# EAGLE board Swarm Board (EAGLE 6.2)
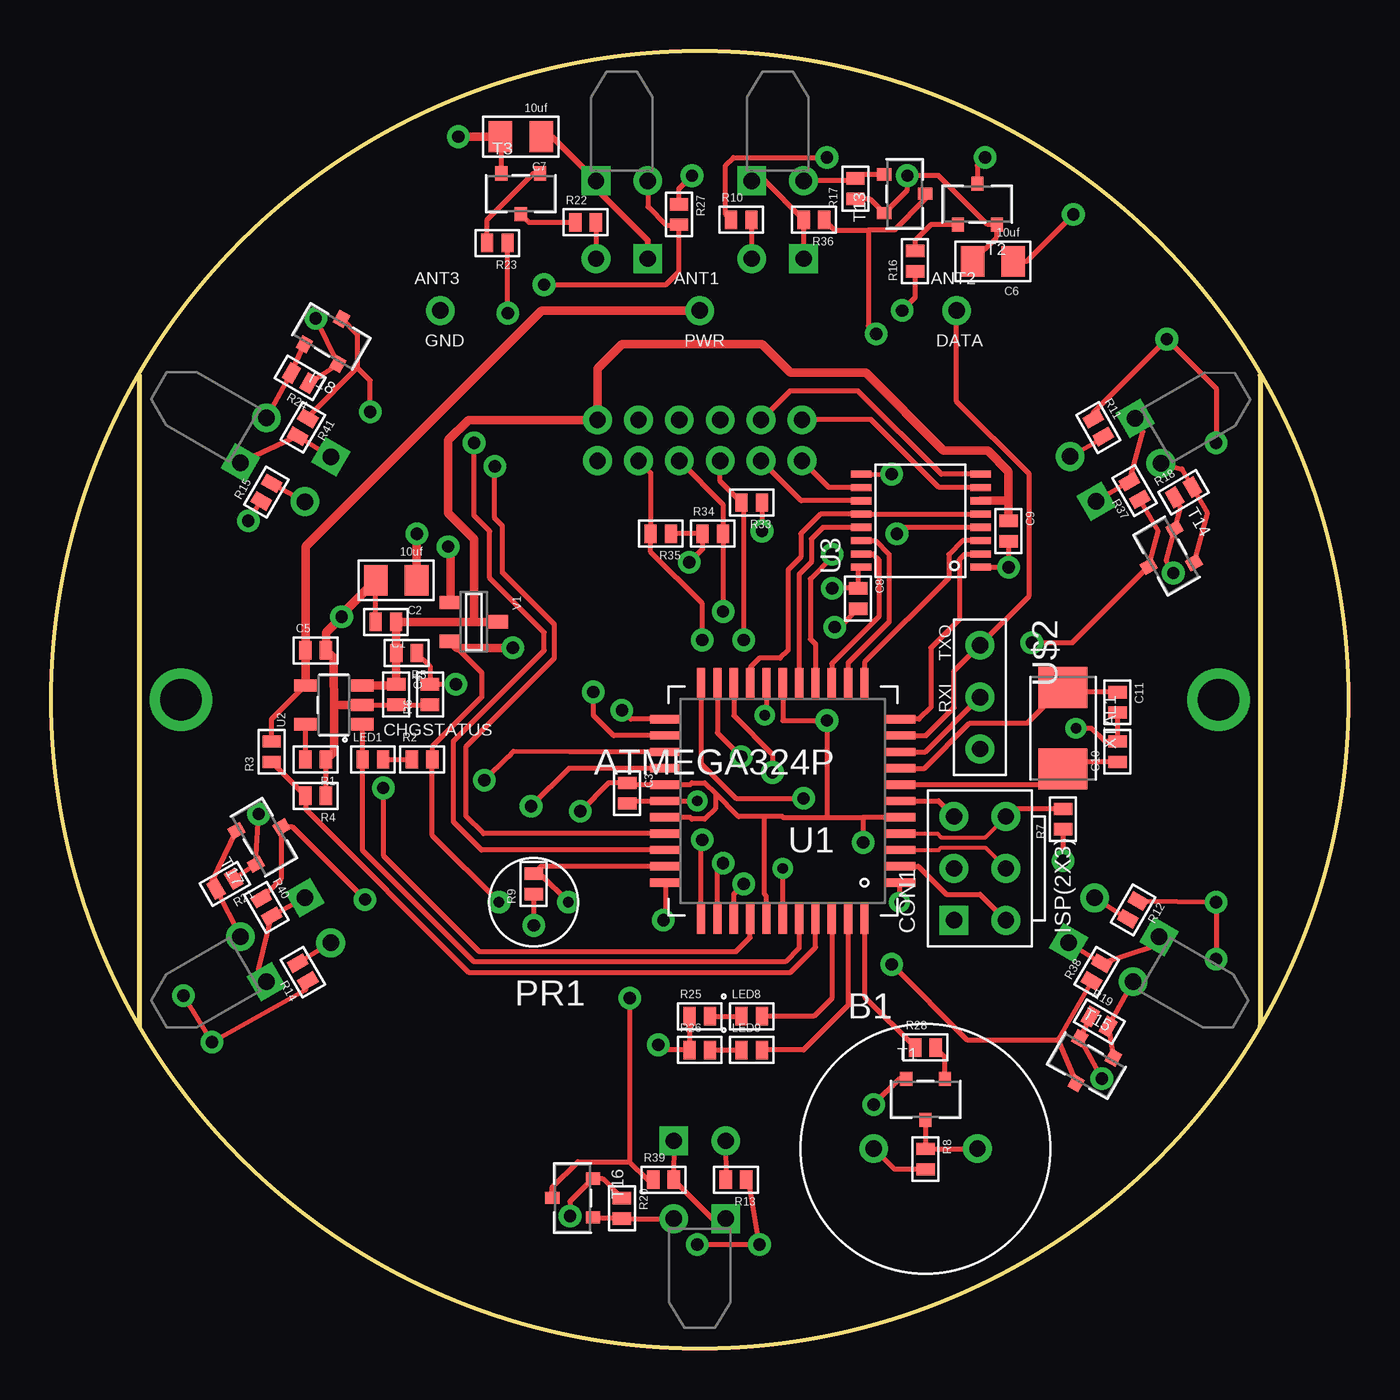
[diagram p0: board, top side]
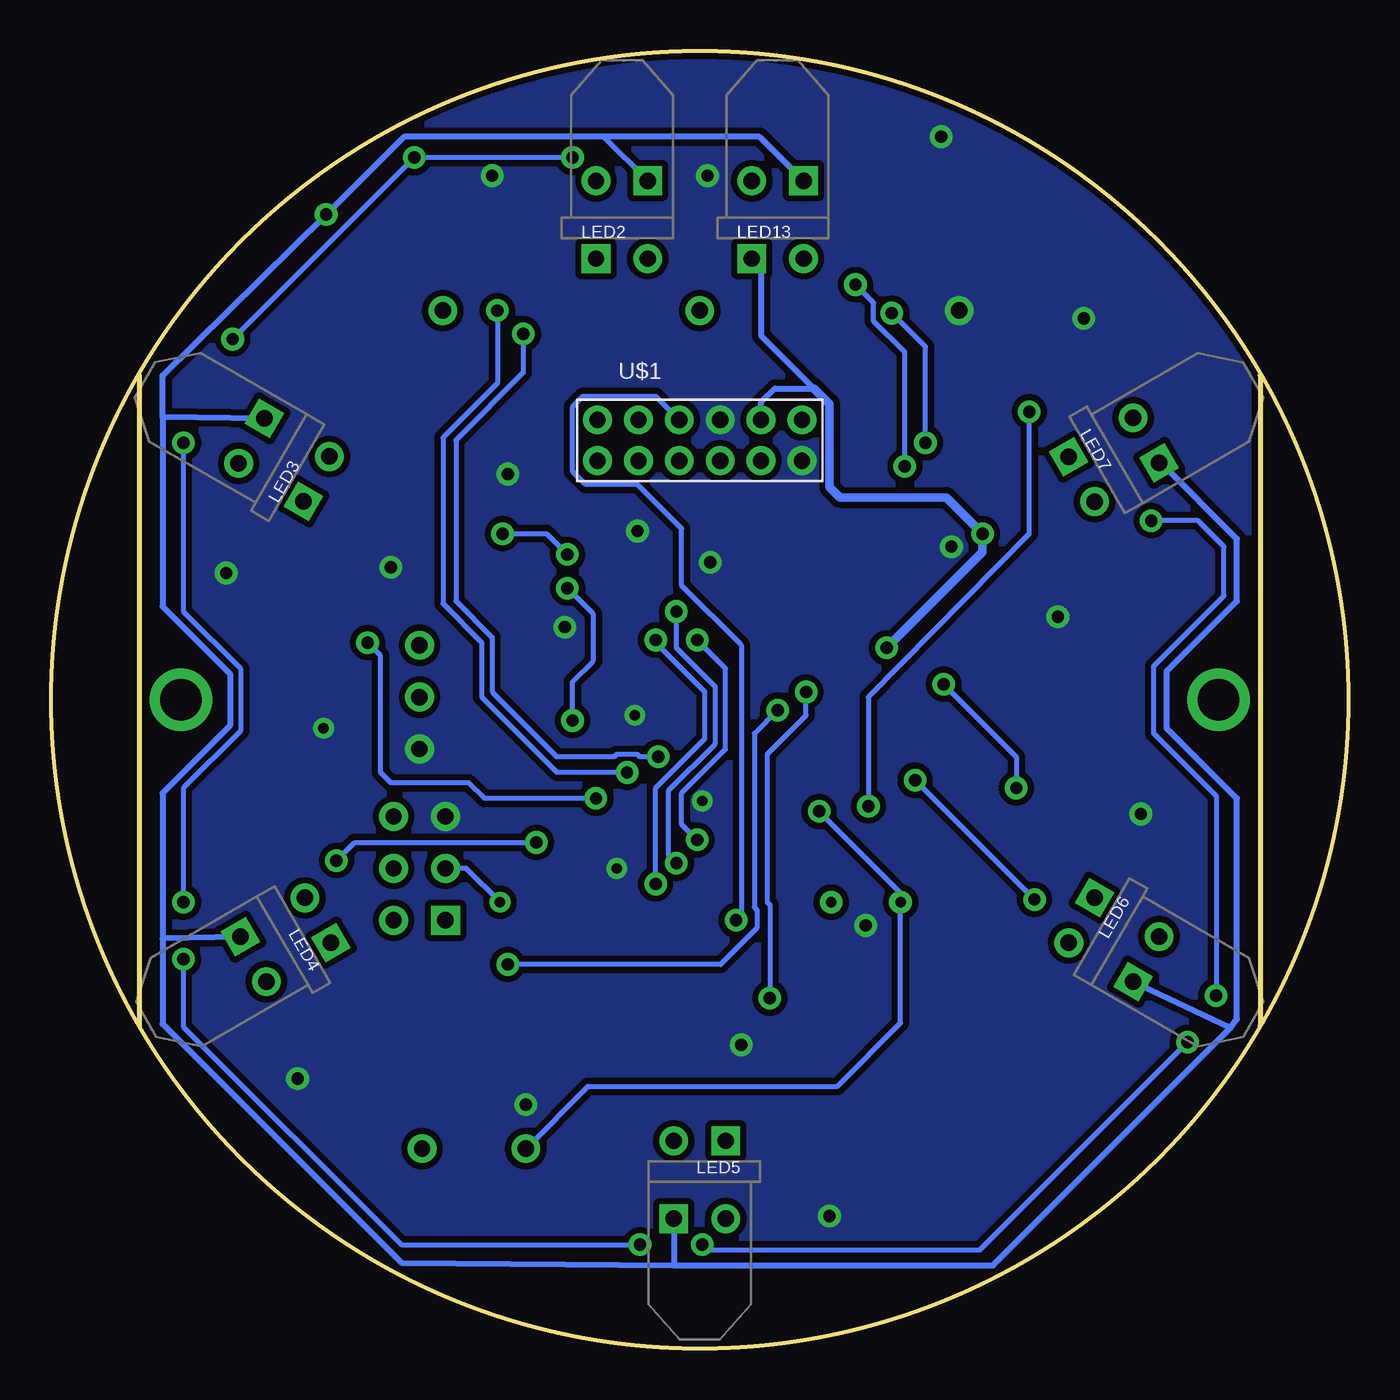
[diagram p1: board, bottom side, seen from below]

Size 63.5 x 63.5 mm. Coordinates in mm from the lower left corner, seen from the top.
Outline: 4.32,47.62 4.32,15.8
Outline: 59.18,47.62 59.18,15.8
Outline: circle at 31.75,31.75 radius 31.75
Copper layers (1*16): Top 0.035mm / dielectric 1.5mm / Bottom 0.035mm
Design rules: minimum track width 8mil, minimum drill 20mil, track to track 8mil, track to pad 8mil, pad to pad 8mil, via to via 8mil, smd to smd 8mil, copper to edge 10mil, drill to drill 8mil, minimum pad ring 12mil, minimum via ring 10mil, stop-mask expansion 4mil, vias tented up to drill 25mil, thermal gap 10mil

## Footprints (pad centres in the part's own frame; a part is rotated, then mirrored left to right if it is on the bottom)
ANTENNA = drill 0.8: P$1 0,0
PIEZOBUZZER = drill 0.8: 1 -2.54,0; 2 2.54,0
0603 = smd 0.6 x 0.9: 1 -0.5,0; 2 0.5,0
0805 = smd 1.15 x 1.5: 1 -1,0; 2 1,0
PINHEADER(2X3) = drill 0.8 square: 1 -2.54,1.27 | drill 0.8: 2 0,1.27; 3 2.54,1.27; 4 2.54,-1.27; 5 0,-1.27; 6 -2.54,-1.27
MOUNTINGHOLE = drill 2.032 pad 2.286: P$2 0,0
LED0603 = smd 0.6 x 0.9: 1 -0.5,0; 2 0.5,0
5MM_LED_RA = drill 0.8 square: 1 -1.27,0 | drill 0.8: 2 1.27,0
CDSPHOTOCELL = drill 0.508: 1 -1.694,0; 2 1.702,0
SOT23 = smd 0.6 x 0.7: 1 0.95,1; 2 -0.95,1; 3 0,-1
3MM_LED_RA = drill 0.8 square: 1 -1.27,0 | drill 0.8: 2 1.27,0
TQFP44 = smd 1.5 x 0.406: 1 -5.75,4; 2 -5.75,3.2; 3 -5.75,2.4; 4 -5.75,1.6; 5 -5.75,0.8; 6 -5.75,0; 7 -5.75,-0.8; 8 -5.75,-1.6; 9 -5.75,-2.4; 10 -5.75,-3.2; 11 -5.75,-4; 23 5.75,-4; 24 5.75,-3.2; 25 5.75,-2.4; 26 5.75,-1.6; 27 5.75,-0.8; 28 5.75,0; 29 5.75,0.8; 30 5.75,1.6; 31 5.75,2.4; 32 5.75,3.2; 33 5.75,4 | smd 0.406 x 1.5: 12 -4,-5.75; 13 -3.2,-5.75; 14 -2.4,-5.75; 15 -1.6,-5.75; 16 -0.8,-5.75; 17 0,-5.75; 18 0.8,-5.75; 19 1.6,-5.75; 20 2.4,-5.75; 21 3.2,-5.75; 22 4,-5.75; 34 4,5.75; 35 3.2,5.75; 36 2.4,5.75; 37 1.6,5.75; 38 0.8,5.75; 39 0,5.75; 40 -0.8,5.75; 41 -1.6,5.75; 42 -2.4,5.75; 43 -3.2,5.75; 44 -4,5.75
(OT)SOT-23(5PAD) = smd 0.6 x 1.1: 1 -0.95,-1.4; 2 0,-1.4; 3 0.95,-1.4; 4 0.95,1.4; 5 -0.95,1.4
16SSOP = smd 0.35 x 1: 1 -2.275,-2.95; 2 -1.625,-2.95; 3 -0.975,-2.95; 4 -0.325,-2.95; 5 0.325,-2.95; 6 0.975,-2.95; 7 1.625,-2.95; 8 2.275,-2.95; 9 2.275,2.9; 10 1.625,2.9; 11 0.975,2.9; 12 0.325,2.9; 13 -0.325,2.9; 14 -0.975,2.9; 15 -1.625,2.9; 16 -2.275,2.9
FEMALE_HEADER_2MM_2X6 = drill 0.8: 1 -5,-1; 2 -3,-1; 3 -1,-1; 4 1,-1; 5 3,-1; 6 5,-1; 7 5,1; 8 3,1; 9 1,1; 10 -1,1; 11 -3,1; 12 -5,1
3PINHEADER_.100" = drill 0.8: 1 -2.54,0; 2 0,0; 3 2.54,0
(TT/NB)SOT-23(3PAD) = smd 0.65 x 1.05: 1 -0.95,-1.15; 2 0.95,-1.15; 3 0,1.15
SMDXTAL = smd 2 x 2.4: 1 -2,0; 2 2,0

## Placement (x,y rotation side)
ANT1  ANTENNA  [ANTENNA]  31.75,50.8 0 top
ANT2  ANTENNA  [ANTENNA]  44.32,50.8 0 top
ANT3  ANTENNA  [ANTENNA]  19.05,50.8 0 top
B1  PIEZOBUZZER  [PIEZOBUZZER]  42.8,9.78 0 top
C1  1uf  [0603]  16.38,35.56 180 top
C2  10uf  [0805]  16.89,37.59 180 top
C3  1uf  [0603]  28.19,27.18 270 top
C4  4.7uf  [0603]  16.89,32 270 top
C5  4.7uf  [0603]  12.95,34.16 0 top
C6  10uf  [0805]  46.1,53.21 180 top
C7  10uf  [0805]  22.99,59.31 180 top
C8  1uf  [0603]  39.5,36.7 270 top
C9  1uf  [0603]  46.86,40.01 270 top
C10  12pf  [0603]  52.2,29.21 90 top
C11  12pf  [0603]  52.2,31.62 270 top
CON1  ISP(2X3)  [PINHEADER(2X3)]  45.47,23.5 90 top
H1  MOUNTINGHOLE  [MOUNTINGHOLE]  6.35,31.75 0 top
H2  MOUNTINGHOLE  [MOUNTINGHOLE]  57.15,31.75 0 top
LED1  red  [LED0603]  15.75,28.83 0 top
LED2  IR  [5MM_LED_RA]  35.56,53.34 0 bottom
LED3  IR  [5MM_LED_RA]  50.51,42.56 60 bottom
LED4  IR  [5MM_LED_RA]  50.44,20.95 120 bottom
LED5  IR  [5MM_LED_RA]  31.75,10.16 180 bottom
LED6  IR  [5MM_LED_RA]  13.06,20.95 240 bottom
LED7  IR  [5MM_LED_RA]  13.06,42.55 300 bottom
LED8  red  [LED0603]  34.29,16.26 0 top
LED9  green  [LED0603]  34.29,14.61 0 top
LED13  IR  [5MM_LED_RA]  27.94,53.34 0 bottom
PR1  500k-20k  [CDSPHOTOCELL]  23.62,21.84 180 top
R1  2k  [0603]  12.95,28.83 180 top
R2  750  [0603]  18.16,28.83 0 top
R3  2k  [0603]  10.79,29.21 90 top
R4  3k  [0603]  12.95,27.05 180 top
R5  7k  [0603]  17.4,34.04 180 top
R6  18k  [0603]  18.54,32 90 top
R7  10k  [0603]  49.53,25.91 90 top
R8  1k  [0603]  42.8,9.27 270 top
R9  20k  [0603]  23.62,22.73 90 top
R10  [0603]  33.78,55.24 0 top
R11  [0603]  51.26,45.07 300 top
R12  [0603]  52.96,21.46 240 top
R13  [0603]  33.53,8.26 180 top
R14  [0603]  12.32,18.41 120 top
R15  [0603]  10.54,41.91 60 top
R16  1k  [0603]  42.29,53.21 90 top
R17  [0603]  39.37,56.77 90 top
R18  [0603]  55.43,41.91 30 top
R19  [0603]  51.31,16 330 top
R20  [0603]  27.94,6.86 270 top
R21  [0603]  8.51,22.73 210 top
R22  [0603]  26.16,55.12 0 top
R23  1k  [0603]  21.84,54.1 180 top
R24  [0603]  12.19,47.5 150 top
R25  750  [0603]  31.75,16.26 0 top
R26  750  [0603]  31.75,14.61 0 top
R27  [0603]  30.73,55.5 270 top
R28  1k  [0603]  42.8,14.73 0 top
R33  [0603]  34.29,41.4 180 top
R34  [0603]  32.38,39.88 0 top
R35  [0603]  29.84,39.88 180 top
R36  [0603]  37.34,55.24 180 top
R37  [0603]  53.04,41.99 120 top
R38  [0603]  51.18,18.41 60 top
R39  [0603]  29.97,8.26 0 top
R40  [0603]  10.54,21.59 300 top
R41  [0603]  12.32,45.09 240 top
T1  NPN2N2222  [SOT23]  42.8,12.19 0 top
T2  NPN2N2222  [SOT23]  45.34,56.01 180 top
T3  NPN2N2222  [SOT23]  22.99,56.52 0 top
T4  TEFT4300  [3MM_LED_RA]  35.56,57.15 0 top
T5  TEFT4300  [3MM_LED_RA]  53.69,44.42 300 top
T6  TEFT4300  [3MM_LED_RA]  53.59,19.05 240 top
T7  TEFT4300  [3MM_LED_RA]  31.75,6.35 180 top
T8  TEFT4300  [3MM_LED_RA]  9.91,19.05 120 top
T9  TEFT4300  [3MM_LED_RA]  9.91,44.45 60 top
T10  TEFT4300  [3MM_LED_RA]  27.94,57.15 0 top
T13  NPN2N2222  [SOT23]  41.78,56.52 90 top
T14  NPN2N2222  [SOT23]  54.6,38.78 300 top
T15  NPN2N2222  [SOT23]  50.67,13.84 330 top
T16  NPN2N2222  [SOT23]  25.53,7.37 270 top
T17  NPN2N2222  [SOT23]  10.41,25.02 120 top
T18  NPN2N2222  [SOT23]  13.72,49.53 150 top
U1  ATMEGA324P  [TQFP44]  35.81,26.8 180 top
U2  MCP73832SOT-23  [(OT)SOT-23(5PAD)]  13.84,31.5 90 top
U3  TB6552FN/FNG  [16SSOP]  42.55,40.51 90 top
U$1  MAIN_CONNECTOR  [FEMALE_HEADER_2MM_2X6]  31.75,44.45 0 bottom
U$2  FTDI_3PIN  [3PINHEADER_.100"]  45.47,31.88 270 top
V1  MCP1700-3002E  [(TT/NB)SOT-23(3PAD)]  20.7,35.56 270 top
XTAL1  10Mhz  [SMDXTAL]  49.53,30.35 270 top

## Library data of the parts
ANT1-ANT3 CON1 H1 H2 U$1 U$2 = Mechanical
B1 C1-C11 LED1-LED9 LED13 PR1 R1-R28 R33-R41 T1-T10 T13-T18 XTAL1 = Passive
U1 U3 = DigitalIC
U2 V1 = PowerIC

## Nets
+3V: B1.1 C2.1 C3.1 C6.1 C7.1 C8.1 LED2.1 LED3.1 LED4.1 LED5.1 LED6.1 LED7.1 LED13.1 PR1.2 R2.2 R7.1 R8.2 R36.2 R37.2 R38.2 R39.2 R40.2 R41.2 T4.1 T5.1 T6.1 T7.1 T8.1 T9.1 T10.1 U1.5 U1.17 U1.27 U1.29 U1.38 U3.16 U$1.8 V1.2
+VBAT: C1.1 C4.1 C9.1 R5.2 U2.3 U3.6 U$1.7 V1.3
+VCHG: ANT1.P$1 C5.1 R3.2 U2.4
AIN1: U1.11 U3.2
AIN2: U1.12 U3.3
APWM: U1.15 U3.4
BIN1: U1.14 U3.15
BIN2: U1.13 U3.14
BPWM: U1.16 U3.13
BUMPER: R35.2 U1.34 U$1.5
BUZZER: R28.1 U1.44
CHGDETECT: R3.1 R4.2 U1.41
CHGSTATUS: LED1.1 U1.40 U2.1
DATAANTENNA: ANT2.P$1 U1.10 U$2.1
DISTANCELED: R23.1 U1.31
DISTANCERECEIVE: R27.2 T10.2 U1.30
GND: ANT3.P$1 C1.2 C2.2 C3.2 C4.2 C5.2 C6.2 C7.2 C8.2 C9.2 C10.2 C11.2 CON1.3 R1.1 R4.1 R6.1 R9.1 R17.1 R18.1 R19.1 R20.1 R21.1 R24.1 R25.1 R26.1 R27.1 R33.1 R34.1 R35.1 T1.2 T2.2 T3.2 T13.2 T14.2 T15.2 T16.2 T17.2 T18.2 U1.6 U1.18 U1.28 U1.39 U2.2 U3.1 U3.9 U$1.6 U$1.9 U$2.3 V1.1
IRENABLE: U1.33 U$1.10
LED1: LED8.2 U1.42
LED2: LED9.2 U1.43
LIGHTSENSE: PR1.1 R9.2 U1.32
LINESENSE1: R33.2 U1.36 U$1.3
LINESENSE2: R34.2 U1.35 U$1.4
MA+: U3.7 U$1.12
MA-: U3.8 U$1.11
MB+: U3.11 U$1.2
MB-: U3.10 U$1.1
N$1: R1.2 U2.5
N$2: CON1.2 U1.1
N$3: CON1.6 U1.2
N$4: LED1.2 R2.1
N$5: CON1.5 U1.3
N$6: CON1.4 R7.2 U1.4
N$8: U1.9 U$2.2
N$9: B1.2 R8.1 T1.3
N$10: R10.1 R11.1 R12.1 R13.1 R14.1 R15.1 T2.3
N$11: R16.2 T2.1
N$12: R22.1 T3.3
N$13: LED2.2 R10.2
N$14: LED3.2 R11.2
N$15: LED4.2 R12.2
N$16: LED5.2 R13.2
N$17: LED6.2 R14.2
N$18: LED7.2 R15.2
N$19: R23.2 T3.1
N$20: LED8.1 R25.2
N$21: LED9.1 R26.2
N$23: C10.1 U1.7 XTAL1.2
N$24: C11.1 U1.8 XTAL1.1
N$25: LED13.2 R22.2
N$26: R28.2 T1.1
N$27: R17.2 T4.2 T13.1
N$34: R24.2 T9.2 T18.1
N$35: R21.2 T8.2 T17.1
N$36: R20.2 T7.2 T16.1
N$37: R19.2 T6.2 T15.1
N$38: R18.2 T5.2 T14.1
RX1: R36.1 T13.3 U1.21
RX2: R37.1 T14.3 U1.22
RX3: R38.1 T15.3 U1.23
RX4: R39.1 T16.3 U1.24
RX5: R40.1 T17.3 U1.25
RX6: R41.1 T18.3 U1.26
STBY: U1.19 U3.5 U3.12
TRANSMITLEDS: R16.1 U1.20
VSENSE: R5.1 R6.2 U1.37

## Tracks (layer width: path | path; a pad name or v marks a point on that pad's centre or on a via)
+3V  (via drill 0.6 pad 0.41, 0.6 pad 0.61)
  Top 0.254: 32.51,27.18 32,27.69 31.37,27.69 31.28,27.6 U1.27 28.27,27.6 C3.1 27.3,27.68 v25.91,26.29 | 32.51,27.18 32.51,26.42 32,25.91 31.37,25.91 31.28,26 U1.29 | 32.51,27.18 33.66,26.04 34.92,26.04 | 37.97,26 35.81,26 35.81,26.04 34.92,26.04 | 37.97,26 39.75,26 | U1.38 35.01,22.14 34.92,22.23 34.92,26.04 | LED2.1 R36.2 34.93,57.15 T4.1 | LED3.1 51.15,41.48 R37.2 53.44,44.85 T5.1 | LED4.1 R38.2 53.98,19.68 T6.1 | LED5.1 R39.2 32.38,6.35 T7.1 | LED6.1 R40.2 10.16,18.54 T8.1 | LED7.1 R41.2 T9.1 | U3.16 39.53,38.23 39.5,38.2 C8.1 39.49,37.21 v38.23,37.21 | R8.2 41.27,8.77 B1.1 | V1.2 21.08,33.08 21.08,31.88 18.66,29.46 R2.2 18.66,25.1 PR1.2 | U1.5 39.75,26 | R7.1 v49.53,23.88 | v39.75,24.77 39.75,26 | 37.97,26 v37.97,30.73 35.81,30.73 U1.17 | C6.1 47.75,53.21 v50.04,55.5
  Top 0.305: LED13.1 29.21,54.23 26.67,56.77 T10.1 24.51,59.31 C7.1
  Top 0.406: C2.1 17.89,39.86 v17.91,39.88 | v22.61,34.29 19.87,34.29 V1.2
  Bottom 0.254: 36.45,59.31 T4.1 | 9.19,43.35 T9.1 | v49.53,23.88 48.64,24.77 v39.75,24.77 | v37.97,30.73 37.97,32.64 36.96,33.66 36.96,35.94 v38.23,37.21 | v25.91,26.29 21.92,22.3 PR1.2 21.92,15.93 25.02,12.83 37.21,12.83 B1.1
  Bottom 0.305: T10.1 28.83,59.31 36.45,59.31 46.23,59.31 v50.04,55.5 58.04,47.62 58.04,45.59 | 58.04,45.59 58.04,36.32 54.74,33.02 54.74,30.48 58.04,27.18 58.04,20.07 | 58.04,20.07 58.04,15.88 46.35,4.19 33.02,4.06 | 33.02,4.06 17.4,4.06 5.78,15.68 | 5.78,15.68 5.46,16.13 5.46,26.92 8.89,30.35 8.89,33.15 5.46,36.58 5.46,39.62 9.19,43.35 | T5.1 58.04,45.59 | T6.1 58.04,20.07 | T7.1 33.02,4.06 | T8.1 5.78,15.68 | U$1.8 28.75,46.31 28.07,46.99 26.16,46.99 28.75,49.58 28.75,52.88 LED13.1
  Bottom 0.406: v22.61,34.29 17.91,38.99 v17.91,39.88 19.68,41.66 24.89,41.66 25.4,42.16 25.4,46.23 26.16,46.99
+VBAT
  Top 0.254: 16.83,32.45 C4.1 | 16.89,34.03 R5.2 | 16.9,35.54 C1.1
  Top 0.406: U2.3 16.83,32.45 | C4.1 16.89,34.03 | R5.2 16.9,35.54 | V1.3 20.7,35.56 | 20.7,35.56 C1.1 | 46.86,41.53 46.86,42.93 45.85,43.94 43.69,43.94 39.88,47.75 36.2,47.75 34.8,49.15 27.94,49.15 26.75,47.96 U$1.7 20.43,45.45 19.43,44.45 19.43,40.89 20.7,39.62 20.7,35.56 | 46.86,41.53 C9.1 | U3.6 46.82,41.49 46.86,41.53
+VCHG
  Top 0.254: 12.45,32.46 U2.4 10.79,30.8 R3.2
  Top 0.406: 12.45,32.46 C5.1 12.45,39.25 24,50.8 ANT1.P$1
AIN1
  Top 0.254: U3.2 45.47,38.86 44.7,38.86 44.45,38.61 44.45,35.69 43.05,34.29 43.05,31.37 42.48,30.8 U1.11
AIN2
  Top 0.254: U3.3 44.62,39.54 43.94,38.86 43.94,37.72 39.81,33.59 U1.12
APWM  (via drill 0.6 pad 0.41)
  Top 0.254: U3.4 41.71,40.19 v41.4,39.88 | v38.23,38.86 38.23,38.73 37.16,37.67 37.16,34.72 37.41,34.47 U1.15
  Bottom 0.254: v41.4,39.88 39.24,39.88 v38.23,38.86
BIN1
  Top 0.254: U3.15 40.23,38.89 40.51,38.61 40.51,35.81 38.21,33.52 U1.14
BIN2
  Top 0.254: U3.14 40.34,39.54 41.02,38.86 41.02,35.56 39.01,33.55 U1.13
BPWM
  Top 0.254: U3.13 37.77,40.19 37.21,39.62 37.21,38.48 36.61,37.88 U1.16
BUMPER  (via drill 0.6 pad 0.41)
  Top 0.254: U1.34 31.81,24.83 v31.88,24.89 | v31.88,34.67 31.88,36.45 29.34,38.98 R35.2 29.34,42.85 U$1.5
  Bottom 0.254: v31.88,24.89 32.64,25.65 32.64,27.18 30.48,29.34 30.48,33.27 v31.88,34.67
BUZZER
  Top 0.254: U1.44 39.81,17.22 R28.1
CHGDETECT
  Top 0.254: R3.1 R4.2 12.45,26.41 20.45,18.41 36.2,18.41 37.41,19.63 U1.41
CHGSTATUS
  Top 0.254: U2.1 LED1.1 15.25,24.38 20.7,18.92 35.94,18.92 36.61,19.6 U1.40
DATAANTENNA
  Top 0.254: U1.10 42.82,30 44.2,31.37 44.2,33.15 U$2.1 47.88,36.83 47.88,42.8 44.32,46.35 ANT2.P$1
DISTANCELED  (via drill 0.6 pad 0.41)
  Top 0.254: U1.31 21.07,24.4 19.68,25.78 19.68,29.72 24.13,34.16 24.13,35.05 21.46,37.72 21.46,40.01 20.7,40.77 v20.7,44.32 | v22.35,50.67 22.35,54.09 R23.1
  Bottom 0.254: v20.7,44.32 20.7,49.02 v22.35,50.67
DISTANCERECEIVE  (via drill 0.6 pad 0.41)
  Top 0.254: T10.2 29.21,55.88 30.1,54.99 R27.2 30.73,52.7 30.1,52.07 v24.13,52.07 | U1.30 21.16,25.2 20.32,26.04 20.32,29.46 24.64,33.78 24.64,35.43 22.1,37.97 22.1,40.26 21.72,40.64 v21.72,43.18
  Bottom 0.254: v21.72,43.18 21.72,48.77 23.24,50.29 23.24,51.18 v24.13,52.07
GND  (via drill 0.51, 0.6 pad 0.41, 0.6 pad 0.51)
  Top 0.254: U1.6 43.43,26.8 CON1.3 | C11.2 C10.2 51.57,29.71 50.93,30.35 v50.16,30.35 | U1.18 35.01,31.08 v34.92,30.99 | v31.62,26.8 U1.28 28.31,26.8 C3.2 | U1.39 v35.81,23.5 | R18.1 55.27,41.18 T14.2 54.57,38.57 v54.93,37.95 | R27.1 30.73,56.77 v31.37,57.4 | R17.1 40.08,56.27 T13.2 41.91,56.69 v41.91,57.4 43.43,57.4 45.83,55.01 T2.2 46.29,54.4 C6.2 | R19.1 T15.2 v51.44,13.21 | 27.87,7.43 R20.1 26.98,8.32 T16.2 25.4,7.19 v25.4,6.48 | R21.1 T17.2 v10.16,26.16 | R24.1 T18.2 v12.95,50.42 | T1.2 41.51,13.19 v40.26,11.94 | R25.1 R26.1 29.97,14.61 v29.72,14.86 | U3.9 39.9,42.78 v41.15,42.8 | U3.1 v46.85,38.24 v46.86,38.23 C9.2 | C8.2 38.6,35.31 v38.35,35.31 | R9.1 v23.62,20.7 | R4.1 R1.1 | U2.2 C4.2 | C4.2 | C1.2 C2.2 | C4.2 R6.1 | C7.2 22.04,59.26 T3.2 | R35.1 R34.1 31.89,39.12 v31.24,38.48 | R33.1 v34.8,40.01
  Top 0.406: C2.2 14.22,35.92 v14.22,35.81 13.45,35.04 C5.2 13.84,33.78 13.84,33.15 13.84,31.5 | C7.2 v19.94,59.31 | V1.1 19.55,39.12 v19.43,39.24 | U2.2 13.84,31.5 | R1.1 13.84,29.22 13.84,31.5
  Bottom 0.254: v10.16,26.16 10.16,26.29 | v31.24,38.48 31.24,38.61
  pour Bottom (isolate 0.305, no thermals): 16,61.21 27.43,66.29 46.99,63.25 62.74,47.24 66.8,26.42 55.12,4.06 27.69,-4.06 4.06,8.64 -1.91,28.07 -0.38,47.62 13.46,60.2
IRENABLE  (via drill 0.6 pad 0.41)
  Top 0.254: U1.33 30.06,21.05 v29.97,20.95
  Bottom 0.254: U$1.10 33.91,46.61 37.47,46.61 37.97,46.1 37.97,42.93 37.34,42.29 34.8,42.29 32.64,40.13 32.64,37.34 29.72,34.42 29.72,21.21 v29.97,20.95
LED1
  Top 0.254: U1.42 38.21,17.13 37.34,16.26 LED8.2
LED2
  Top 0.254: U1.43 39.01,16.79 36.83,14.61 LED9.2
LIGHTSENSE
  Top 0.254: PR1.1 23.93,23.23 R9.2 23.99,23.6 U1.32
LINESENSE1  (via drill 0.6 pad 0.41)
  Top 0.254: U1.36 33.41,22.24 v33.91,22.73 | v33.91,34.67 33.91,41.28 R33.2 32.75,42.44 U$1.3
  Bottom 0.254: v33.91,22.73 33.91,27.43 31.5,29.84 31.5,32.13 33.91,34.54 v33.91,34.67
LINESENSE2  (via drill 0.6 pad 0.41)
  Top 0.254: U1.35 32.61,23.47 v32.89,23.75 | U$1.4 32.88,41.31 R34.2 32.89,39.87 v32.89,36.07
  Bottom 0.254: v32.89,23.75 33.27,24.13 33.27,27.3 30.99,29.59 30.99,32.38 32.89,34.29 v32.89,36.07
MA+
  Top 0.254: U3.7 43.46,42.14 40.13,45.47 36.77,45.47 U$1.12
MA-
  Top 0.254: U3.8 43.57,42.79 39.5,46.86 36.16,46.86 U$1.11
MB+
  Top 0.254: U3.11 36.71,41.49 U$1.2
MB-
  Top 0.254: U3.10 38.06,42.14 U$1.1
N$1
  Top 0.254: U2.5 R1.2
N$2  (via drill 0.51)
  Top 0.203: U1.1 41.53,22.76
  Top 0.254: 41.53,22.76 v41.53,21.84
  Bottom 0.254: v41.53,21.84 43.18,23.5 CON1.2
N$3
  Top 0.254: U1.2 42.44,23.6 43.81,22.23 45.47,22.23 CON1.6
N$4
  Top 0.254: LED1.2 R2.1
N$5
  Top 0.203: U1.3 43.45,24.4 43.56,24.51 45.72,24.51 CON1.5
N$6
  Top 0.203: U1.4 43.38,25.2 43.56,25.02 45.72,25.02 CON1.4
  Top 0.254: R7.2 47.11,26.41 CON1.4
N$8
  Top 0.254: U1.9 42.79,29.2 U$2.2
N$9
  Top 0.254: T1.3 R8.1 B1.2
N$10  (via drill 0.6 pad 0.41)
  Top 0.254: R10.1 33.02,55.5 33.02,57.91 33.4,58.29 v37.97,58.29 | v57.02,44.32 57.02,46.99 v54.61,49.4 51.01,45.8 R11.1 | v57.02,19.05 v57.02,21.84 R12.1 | v31.62,5.08 v34.67,5.08 34.16,8.12 R13.1 | v6.48,17.27 v7.87,14.99 12.45,17.53 R14.1 | v9.65,40.51 R15.1 | v45.72,58.29 45.34,57.91 T2.3
  Bottom 0.254: v37.97,58.29 v45.72,58.29 v54.61,49.4 | v57.02,44.32 57.02,36.07 54.23,33.27 54.23,30.23 57.02,27.43 v57.02,21.84 | v57.02,19.05 57.02,15.75 46.35,5.08 v34.67,5.08 | v31.62,5.08 31.37,4.83 18.03,4.83 v7.87,14.99 | v6.48,17.27 6.48,27.05 9.53,30.1 9.53,33.4 6.1,36.83 6.1,39.24 7.37,40.51 v9.65,40.51
N$11
  Top 0.254: T2.1 43.07,55.01 42.29,54.23 R16.2
N$12
  Top 0.254: T3.3 23.38,55.12 R22.1
N$13
  Top 0.254: R10.2 LED2.2
N$14
  Top 0.254: LED3.2 51.5,44.59 R11.2
N$15
  Top 0.254: LED4.2 R12.2
N$16
  Top 0.254: LED5.2 R13.2
N$17
  Top 0.254: LED6.2 R14.2
N$18
  Top 0.254: R15.2 LED7.2
N$19
  Top 0.254: R23.2 21.34,55.25 23.61,57.52 T3.1
N$20
  Top 0.254: R25.2 LED8.1
N$21
  Top 0.254: R26.2 LED9.1
N$23
  Top 0.254: U1.7 48.77,27.6 XTAL1.2 49.53,28.71 C10.1
N$24
  Top 0.254: U1.8 42.75,28.4 44.96,30.61 47.78,30.61 XTAL1.1 49.53,32.12 C11.1
N$25
  Top 0.254: R22.2 LED13.2
N$26
  Top 0.254: T1.1 43.75,14.28 R28.2
N$27
  Top 0.254: T13.1 39.57,57.47 R17.2 39.25,57.15 T4.2
N$34
  Top 0.254: T9.2 R24.2 T18.1
N$35
  Top 0.254: T8.2 R21.2 7.87,22.86 T17.1
N$36
  Top 0.254: T7.2 R20.2 26.59,6.36 T16.1
N$37
  Top 0.254: T6.2 R19.2 T15.1
N$38
  Top 0.254: T5.2 55.35,43.04 R18.2 56.59,40.9 T14.1
RX1  (via drill 0.6 pad 0.41)
  Top 0.254: T13.3 42.78,56.24 41.27,54.74 40.01,54.74 | R36.1 38.35,54.74 40.01,54.74 | U1.21 32.61,30.12 v33.78,28.96 | 40.01,54.74 40.01,50.04 v40.39,49.66
  Bottom 0.254: v40.39,49.66 40.39,47.75 43.69,44.45 43.69,36.58 41.91,34.8 41.91,32.13 38.73,28.96 35.94,28.96 35.81,29.08 34.8,29.08 34.67,28.96 v33.78,28.96
RX2  (via drill 0.6 pad 0.41)
  Top 0.254: R37.1 54.19,40 T14.3 49.99,34.54 v48.01,34.54 | U1.22 31.81,28.64 33.53,26.92 v36.83,26.92
  Bottom 0.254: v36.83,26.92 42.29,26.92 43.05,27.69 46.86,27.69 47.37,28.19 47.37,33.91 v48.01,34.54
RX3  (via drill 0.6 pad 0.41)
  Top 0.254: R38.1 49.28,15.11 | 49.28,15.11 T15.3 | U1.23 28.38,30.8 v27.94,31.24 | v41.15,18.8 44.83,15.11 49.28,15.11
  Bottom 0.254: v27.94,31.24 29.08,30.1 29.08,21.59 28.96,21.46 28.96,20.57 30.73,18.8 v41.15,18.8
RX4  (via drill 0.6 pad 0.41)
  Top 0.254: T16.3 24.53,7.89 25.78,9.14 28.32,9.14 | R39.1 29.21,8.26 28.32,9.14 | U1.24 27.53,30 26.54,30.99 v26.54,32.13 | v28.32,17.14 28.32,9.14
  Bottom 0.254: v28.32,17.14 28.32,21.72 28.45,21.84 28.45,29.08 26.54,30.99 v26.54,32.13
RX5  (via drill 0.6 pad 0.41)
  Top 0.254: R40.1 11.28,23.01 T17.3 11.82,25.52 v15.37,21.97 | v21.21,27.81 22.36,28.94 22.62,29.22 25.39,29.2 U1.25
  Bottom 0.254: v21.21,27.81 v15.37,21.97
RX6  (via drill 0.6 pad 0.41)
  Top 0.254: T18.3 14.99,49.63 14.99,48.01 | 14.99,48.01 12.7,45.72 R41.1 | U1.26 25.35,28.4 v23.5,26.54 | v15.62,45.85 15.62,47.37 14.99,48.01
  Bottom 0.254: v15.62,45.85 15.62,39.88 23.5,31.88 v23.5,26.54
STBY
  Top 0.254: U3.5 U3.12 37.66,40.84 36.7,39.88 36.7,38.73 36.07,38.1 36.07,34.16 35.69,33.78 34.67,33.78 34.21,33.33 U1.19
TRANSMITLEDS  (via drill 0.6 pad 0.41)
  Top 0.254: U1.20 33.41,30.98 35.31,29.08 v35.31,28.19 | R16.1 42.29,51.44 v41.66,50.8
  Bottom 0.254: v35.31,28.19 38.73,28.19 42.42,31.88 42.42,34.54 44.32,36.45 44.32,44.58 41.66,47.24 v41.66,50.8
VSENSE  (via drill 0.6 pad 0.41)
  Top 0.254: R5.1 18.54,33.39 R6.2 18.55,32.51 v19.81,32.51 | v16.26,27.43 16.26,24.13 20.95,19.43 33.53,19.43 34.21,20.12 U1.37
  Bottom 0.254: v19.81,32.51 16.26,28.96 v16.26,27.43

## Text on the board
tPlace: GND | PWR | DATA | TXO | RXI | CHGSTATUS